# Altium PCB DebugBoard.PcbDoc
Units mm, origin at the board's own origin, x right, y up, seen from the top; angles counter-clockwise.
Board outline 45.09 x 43.18 mm, 4 copper layers (F.Cu, In1.Cu, In2.Cu, B.Cu); 20 components, 19 nets, 63 pads, 6 vias.
Unrouted connection lines stored in the file: 4.
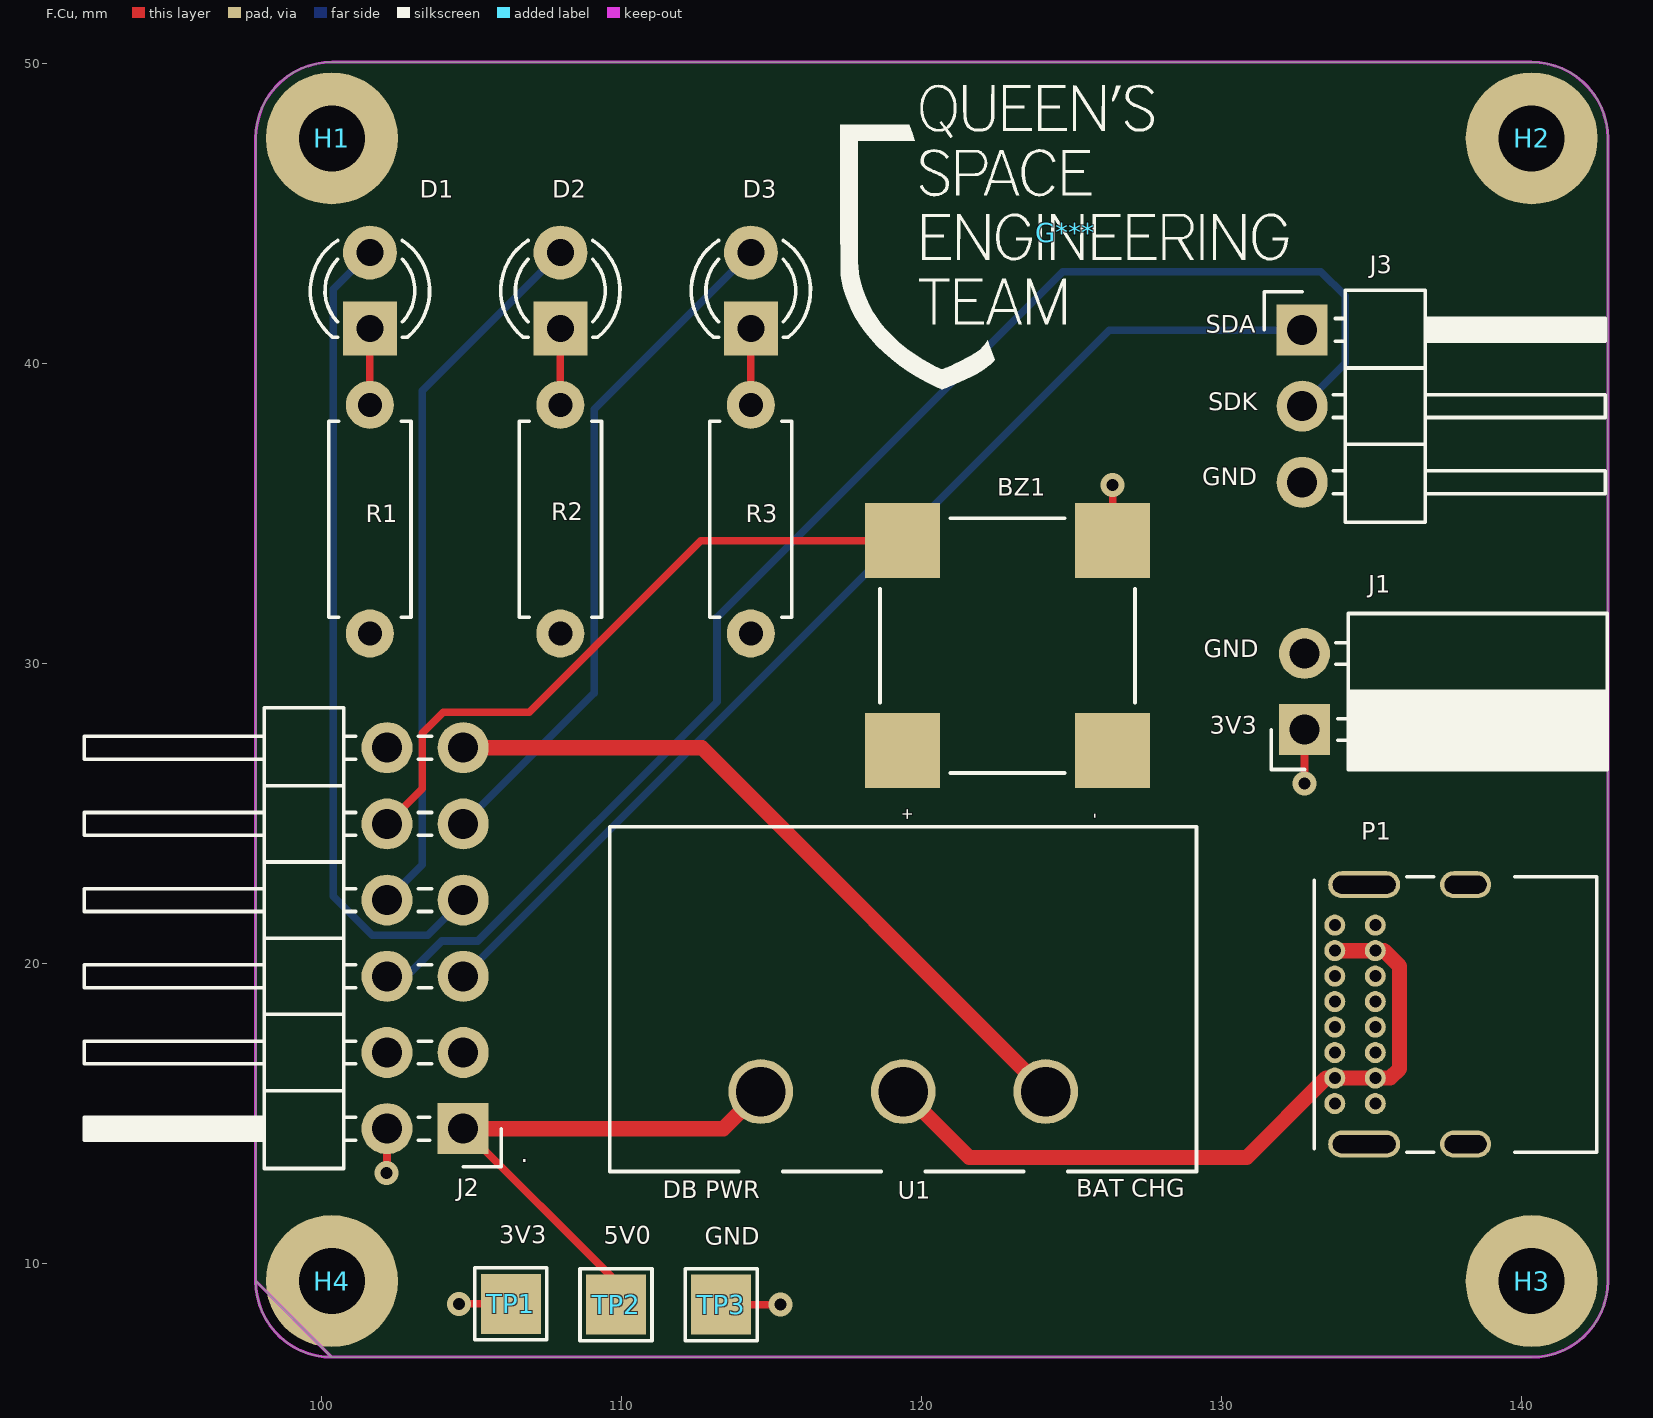
[diagram p0: F.Cu view]
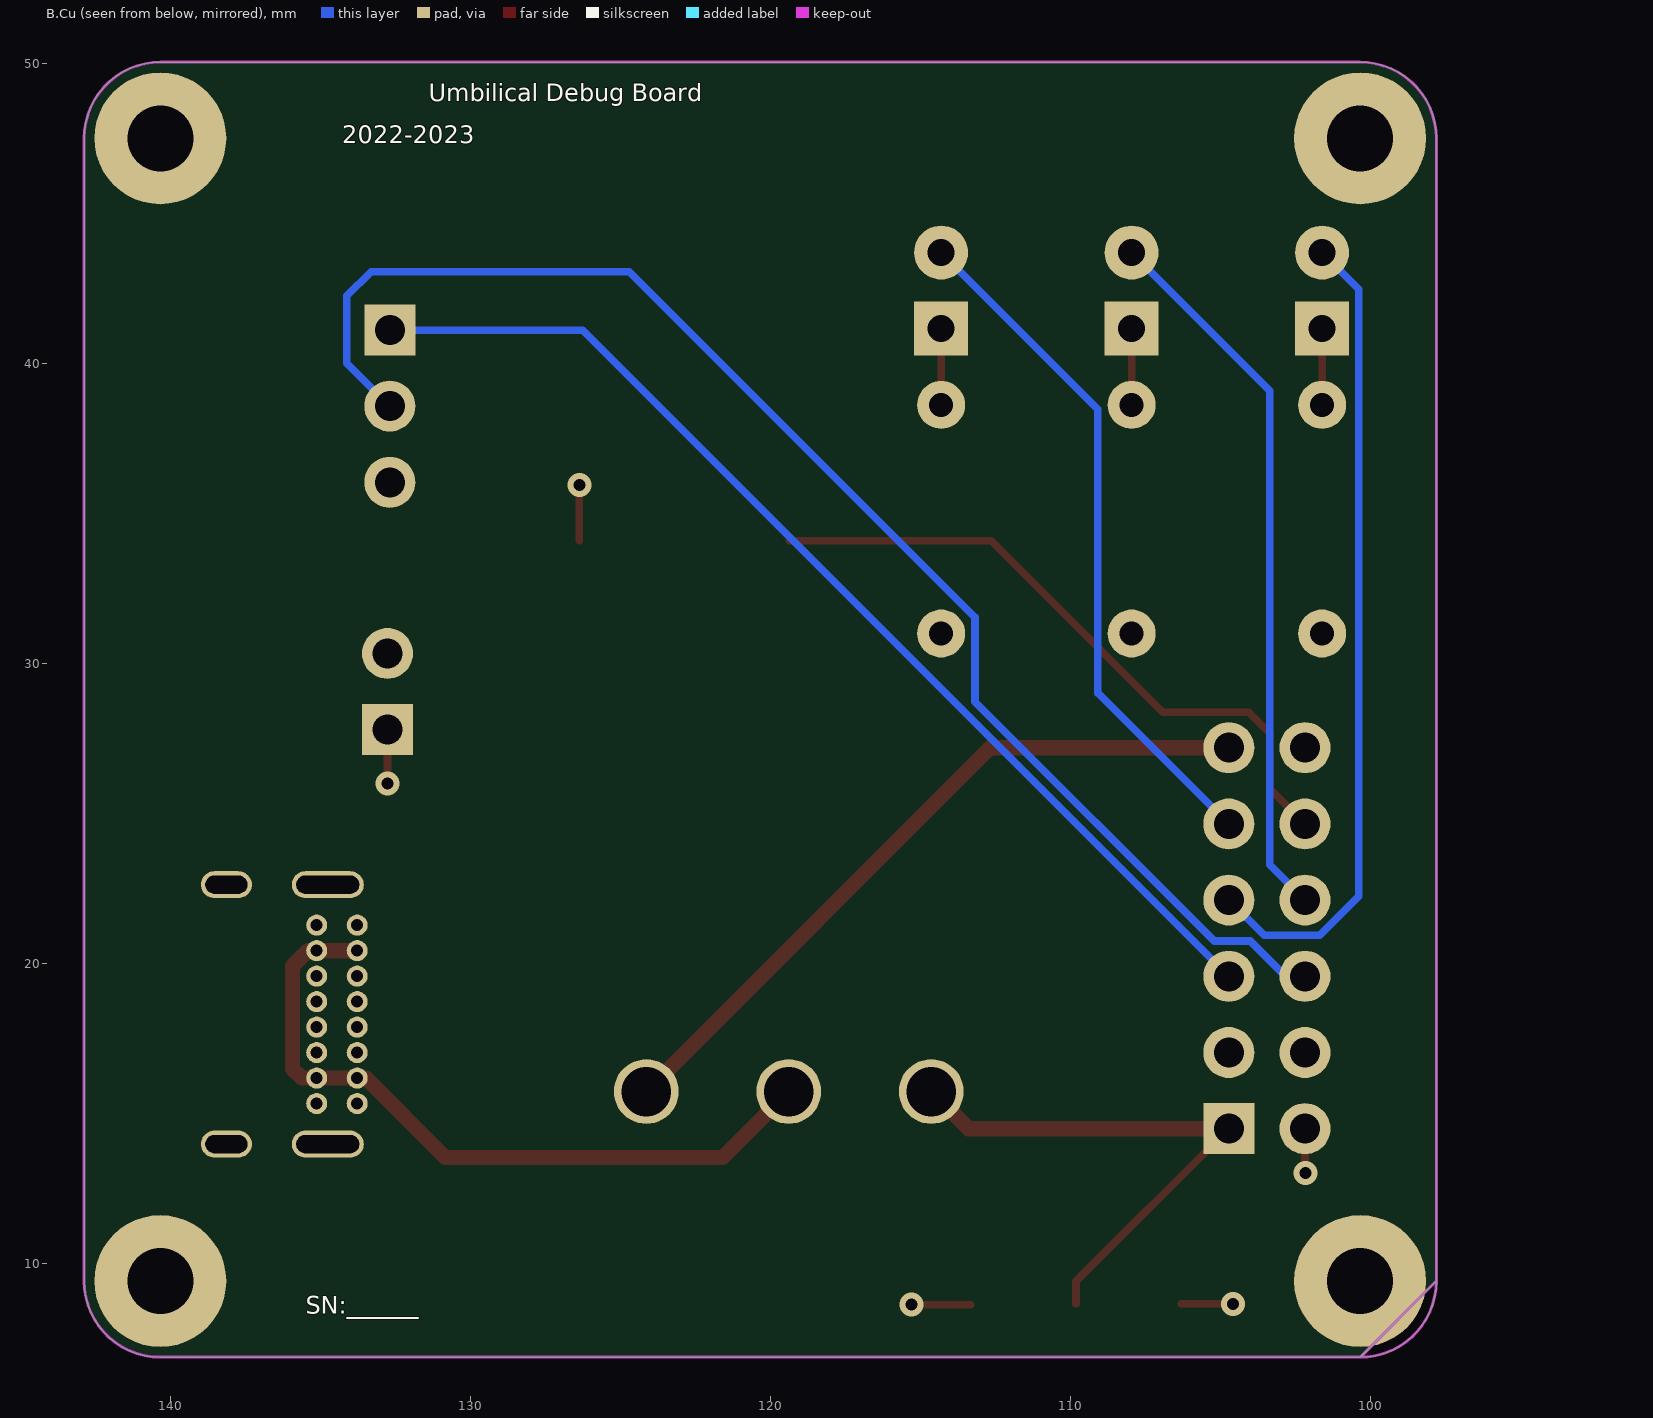
[diagram p1: B.Cu view, seen from below]
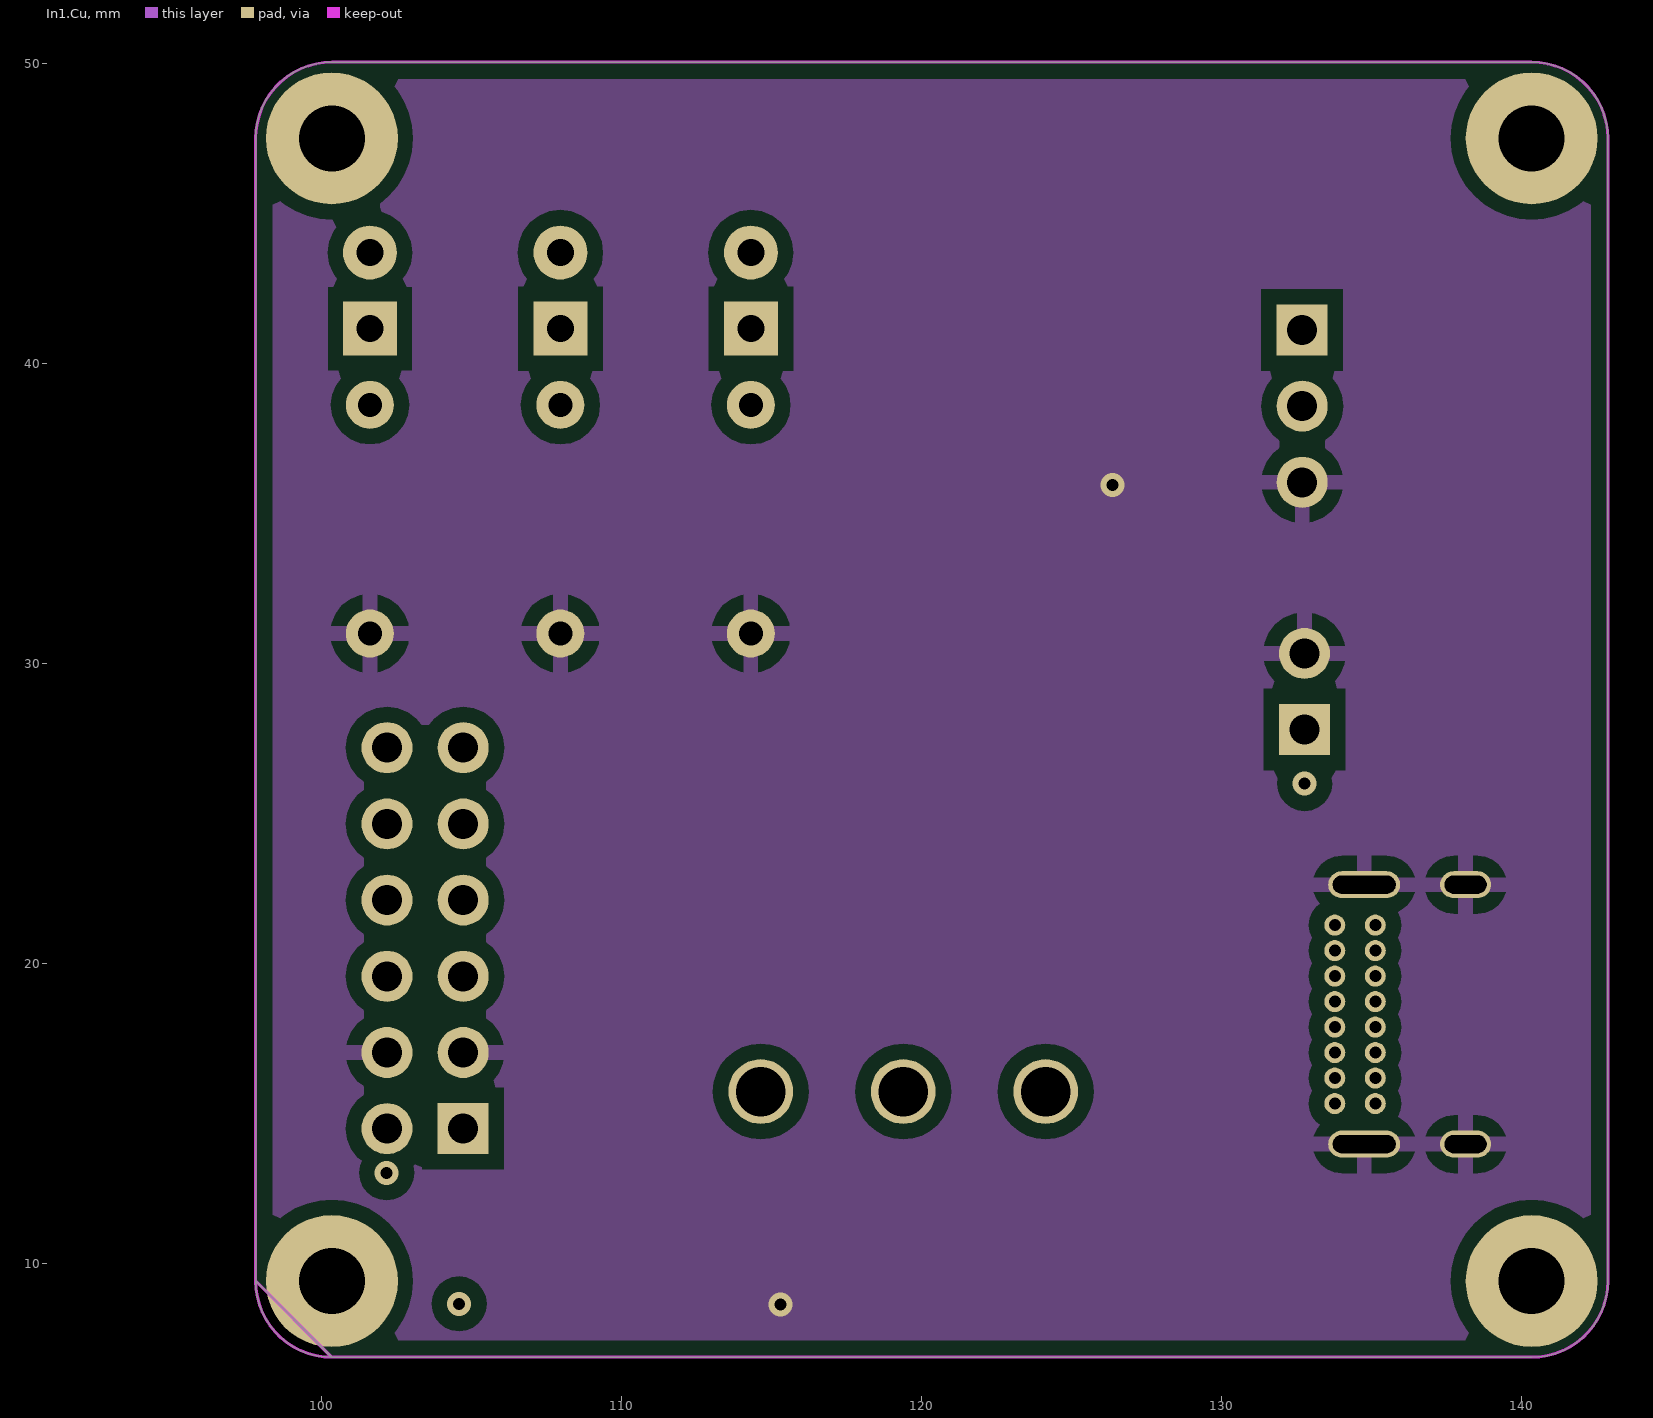
[diagram p2: In1.Cu]
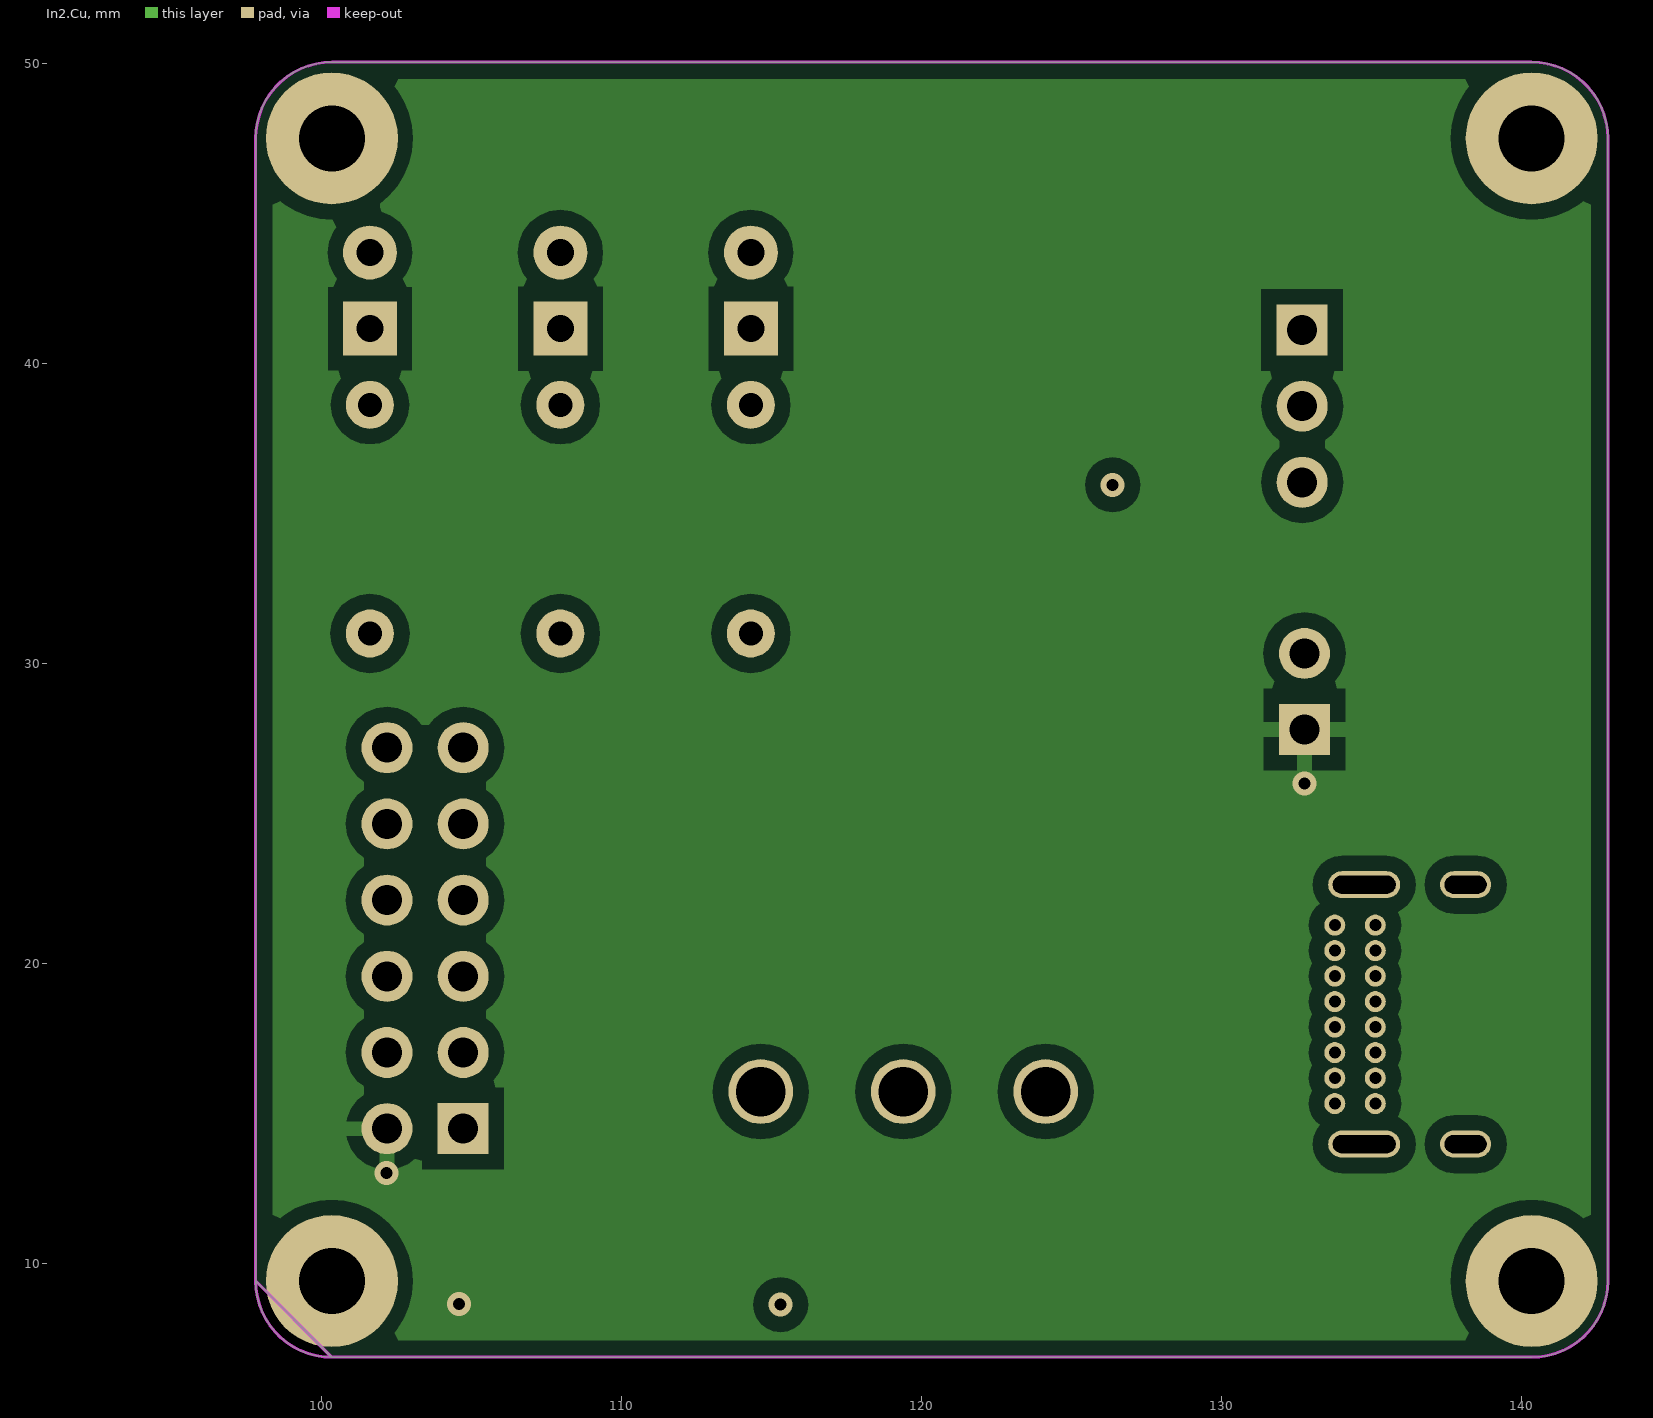
[diagram p3: In2.Cu]

## Layer stack, top to bottom
F.Mask: solder mask 0.0102, Solder Resist, Dk 3.5
F.Cu: signal copper 0.0356
Dielectric 1: dielectric 0.32, FR-4, Dk 4.8
In1.Cu: signal copper 0.0356
Dielectric2: dielectric 0.32, FR-4, Dk 4.8
In2.Cu: signal copper 0.0356
Dielectric3: dielectric 0.32, FR-4, Dk 4.8
B.Cu: signal copper 0.0356
B.Mask: solder mask 0.0102, Solder Resist, Dk 3.5

## Board outline
100.33,6.88 cw(c100.33,9.42) 97.79,9.42 97.79,47.52 cw(c100.33,47.52) 100.33,50.06 140.335,50.06 cw(c140.335,47.52) 142.875,47.52 142.875,9.42 cw(c140.335,9.42) 140.335,6.88 100.33,6.88 cw(c100.33,9.42) 100.33,6.88

## Design rules (kind name [scope] priority, off if disabled: settings)
Clearance "Clearence 0.508_Polygon" [InNamedPolygon('In1.Cu-GND') OR InNamedPolygon('In2.Cu-3V3_OUT')] p1: gap=0.508 ignorepadtopadclearanceinfootprint=FALSE
MinimumSolderMaskSliver [All] p1: minsoldermaskwidth=0
PolygonConnect Polygon_In2.Cu-3V3_OUT_ConnectDirect [IsNamedPolygon('In2.Cu-3V3_OUT') vs IsVia] p1: connectstyle=Direct reliefconductorwidth=0.254 reliefentries=4 polygonreliefangle="90 Angle" airgapwidth=0.254
PolygonConnect Polygon_In2.Cu-3V3_OUT_ConnectRelief45 [IsNamedPolygon('In2.Cu-3V3_OUT') vs (IsThruPin or IsSMTPin) and (PadShape_AllLayers = 'Round')] p2: connectstyle=Relief reliefconductorwidth=0.508 reliefentries=4 polygonreliefangle="45 Angle" airgapwidth=0.508
PolygonConnect Polygon_In2.Cu-3V3_OUT_ConnectRelief90 [IsNamedPolygon('In2.Cu-3V3_OUT') vs (IsThruPin or IsSMTPin) and (PadShape_AllLayers <> 'Round')] p3: connectstyle=Relief reliefconductorwidth=0.508 reliefentries=4 polygonreliefangle="90 Angle" airgapwidth=0.508
PolygonConnect Polygon_In1.Cu-GND_ConnectDirect [IsNamedPolygon('In1.Cu-GND') vs IsVia] p4: connectstyle=Direct reliefconductorwidth=0.254 reliefentries=4 polygonreliefangle="90 Angle" airgapwidth=0.254
PolygonConnect Polygon_In1.Cu-GND_ConnectRelief45 [IsNamedPolygon('In1.Cu-GND') vs (IsThruPin or IsSMTPin) and (PadShape_AllLayers = 'Round')] p5: connectstyle=Relief reliefconductorwidth=0.508 reliefentries=4 polygonreliefangle="45 Angle" airgapwidth=0.508
PolygonConnect Polygon_In1.Cu-GND_ConnectRelief90 [IsNamedPolygon('In1.Cu-GND') vs (IsThruPin or IsSMTPin) and (PadShape_AllLayers <> 'Round')] p6: connectstyle=Relief reliefconductorwidth=0.508 reliefentries=4 polygonreliefangle="90 Angle" airgapwidth=0.508
RoutingVias [All] p1: holewidth=0.711 width=1.27 viastyle="Through Hole" minholewidth=0.711 minwidth=1.27 maxholewidth=0.711 maxwidth=1.27
SilkToSilkClearance [All] p1: silktosilkclearance=0
SilkToSolderMaskClearance [IsPad] p1: minsilkscreentomaskgap=0 clearancetoexposedcopper=TRUE
SolderMaskExpansion [All] p1: expansion=0.102 istentingtop=FALSE
Width [All] p1: maxlimit=10 minlimit=0.254 preferedwidth=0.254 minimp=50.000000 maximp=50.000000 favimp=50.000000
27 further rules are at their usual default settings.

## Components (designator, comment, footprint, x,y, rotation, side; value= is the part's Value field where it differs from the comment)
BZ1 "Buzzer" XDCR_CMT-8504-100-SMT-TR 122.86,30.604 r90 top
D1 "RED" LED_D3.0mm 101.6,41.17 r90 top
D2 "YLW" LED_D3.0mm 107.95,41.17 r90 top
D3 "GRN" LED_D3.0mm 114.3,41.17 r90 top
G*** "LOGO" LOGO 124.79,44.37 r0 top
H1 "MountingHole" MountingHole_2.2mm_M2_Pad 100.33,47.52 r0 top
H2 "MountingHole" MountingHole_2.2mm_M2_Pad 140.335,47.52 r0 top
H3 "MountingHole" MountingHole_2.2mm_M2_Pad 140.335,9.42 r0 top
H4 "MountingHole" MountingHole_2.2mm_M2_Pad 100.33,9.42 r0 top
J1 "Conn_01x02_Female" PinSocket_1x02_P2.54mm_Horizontal 132.76,27.805 r180 top
J2 "Conn_02x06_Counter_Clockwise" PinHeader_2x06_P2.54mm_Horizontal 104.71,14.5 r180 top
J3 "Conn_01x03" PinHeader_1x03_P2.54mm_Horizontal 132.683,41.13 r0 top
P1 "USB_C_Plug_USB2.0" USB_C_Receptacle_GCT_USB4085 133.77,15.335 r90 top
R1 "R" R_Axial_DIN0207_L6.3mm_D2.5mm_P7.62mm_Horizontal 101.6,38.63 r270 top
R2 "R" R_Axial_DIN0207_L6.3mm_D2.5mm_P7.62mm_Horizontal 107.95,38.63 r270 top
R3 "R" R_Axial_DIN0207_L6.3mm_D2.5mm_P7.62mm_Horizontal 114.3,38.63 r270 top
TP1 "3V3" TestPoint_Pad_2.0x2.0mm 106.299,8.658 r0 top
TP2 "5V0" TestPoint_Pad_2.0x2.0mm 109.804,8.633 r0 top
TP3 "GND" TestPoint_Pad_2.0x2.0mm 113.309,8.633 r0 top
U1 "L102021MS02Q" L102021MS02Q 124.13,15.738 r180 top

## Footprints (in the part's own frame and the unit in brackets; to place one, negate y for a bottom-side part, rotate by r counter-clockwise, add the part's x,y. Pads: shape width x height; smd on the part's side, far side on the other; paste and mask are expansions set on the pad)
L102021MS02Q [mil]
  round 85 hole 65 paste-99999 mask+0: 1(0,0) 2(187.01,0) 3(374.02,0)
  silkscreen extent -198,-348 572,105
LED_D3.0mm [mm]
  rect 1.8x1.8 hole 0.9 paste-2539.97 mask+0: 1(0,0)
  round 1.8 hole 0.9 paste-2539.97 mask+0: 2(2.54,0)
  silkscreen extent -0.29,-1.99 2.94,1.99
LOGO [mm]
  silkscreen extent -7.5,-5.22 7.42,4.93
MountingHole_2.2mm_M2_Pad [mm]
  round 4.4 hole 2.2 paste-2539.97 mask+0: 1(0,0)
PinHeader_1x03_P2.54mm_Horizontal [mm]
  rect 1.7x1.7 hole 1 paste-2539.97 mask+0: 1(0,0)
  rrect100% 1.7x1.7 hole 1 paste-2539.97 mask+0: 2(0,-2.54) 3(0,-5.08)
  silkscreen extent -1.27,-6.41 10.1,1.33
PinHeader_2x06_P2.54mm_Horizontal [mm]
  rect 1.7x1.7 hole 1 paste-2539.97 mask+0: 1(0,0)
  rrect100% 1.7x1.7 hole 1 paste-2539.97 mask+0: 2(2.54,0) 3(0,-2.54) 4(2.54,-2.54) 5(0,-5.08) 6(2.54,-5.08) 7(0,-7.62) 8(2.54,-7.62) 9(0,-10.16) 10(2.54,-10.16) 11(0,-12.7) 12(2.54,-12.7)
  silkscreen extent -1.27,-14.03 12.64,1.33
PinSocket_1x02_P2.54mm_Horizontal [mm]
  rect 1.7x1.7 hole 1 paste-2539.97 mask+0: 1(0,0)
  rrect100% 1.7x1.7 hole 1 paste-2539.97 mask+0: 2(0,-2.54)
  silkscreen extent -10.09,-3.87 1.11,1.33
R_Axial_DIN0207_L6.3mm_D2.5mm_P7.62mm_Horizontal [mm]
  round 1.6 hole 0.8 paste-2539.97 mask+0: 1(0,0)
  rrect100% 1.6x1.6 hole 0.8 paste-2539.97 mask+0: 2(7.62,0)
  silkscreen extent 0.54,-1.37 7.08,1.37
TestPoint_Pad_2.0x2.0mm [mm]
  rect 2x2 smd paste-2 mask+0: 1(0,0)
  silkscreen extent -1.2,-1.2 1.2,1.2
USB_C_Receptacle_GCT_USB4085 [mm]
  round 0.7 hole 0.4 paste-2539.97 mask+0: A1(0,0) A4(0.85,0) A5(1.7,0) A6(2.55,0) A7(3.4,0) A8(4.25,0) A9(5.1,0) A12(5.95,0) B1(5.95,-1.35) B4(5.1,-1.35) B5(4.25,-1.35) B6(3.4,-1.35) B7(2.55,-1.35) B8(1.7,-1.35) B9(0.85,-1.35) B12(0,-1.35)
  rrect100% 0.9x2.4 hole 2.1 slot 0.6 at 0 deg paste-2539.97 mask+0: S1(-1.35,-0.98) S1(7.3,-0.98)
  rrect100% 0.9x1.7 hole 1.4 slot 0.6 at 0 deg paste-2539.97 mask+0: S1(-1.35,-4.36) S1(7.3,-4.36)
  silkscreen extent -1.62,-8.73 7.57,0.68
XDCR_CMT-8504-100-SMT-TR [mm]
  rect 2.5x2.5 smd mask+0: 1(3.5,3.5) 2(3.5,-3.5) N(-3.5,-3.5) P(-3.5,3.5)
  silkscreen extent -4.25,-4.25 4.25,4.25

## Part data
BZ1: library part XDCR_CMT-8504-100-SMT-TR, Sheetfile=DebugBoard.kicad_sch
D1 D2 D3: library part LED_D3.0mm, "LED, diameter 3.0mm, 2 pins", Sheetfile=DebugBoard.kicad_sch
H1 H2 H3 H4: library part MountingHole_2.2mm_M2_Pad, "Mounting Hole 2.2mm, M2", Sheetfile=DebugBoard.kicad_sch
J1: library part PinSocket_1x02_P2.54mm_Horizontal, "Through hole angled socket strip, 1x02, 2.54mm pitch, 8.51mm socket length, single row (from Kicad 4.0.7), script generated", Sheetfile=DebugBoard.kicad_sch
J2: library part PinHeader_2x06_P2.54mm_Horizontal, "Through hole angled pin header, 2x06, 2.54mm pitch, 6mm pin length, double rows", Sheetfile=DebugBoard.kicad_sch
J3: library part PinHeader_1x03_P2.54mm_Horizontal, "Through hole angled pin header, 1x03, 2.54mm pitch, 6mm pin length, single row", Sheetfile=DebugBoard.kicad_sch
P1: library part USB_C_Receptacle_GCT_USB4085, "USB 2.0 Type C Receptacle, https://gct.co/Files/Drawings/USB4085.pdf", Sheetfile=DebugBoard.kicad_sch
R1 R2 R3: library part R_Axial_DIN0207_L6.3mm_D2.5mm_P7.62mm_Horizontal, "Resistor, Axial_DIN0207 series, Axial, Horizontal, pin pitch=7.62mm, 0.25W = 1/4W, length*diameter=6.3*2.5mm^2, http://cdn-reichelt.de/documents/datenblatt/B400/1_4W%23YAG.pdf", Sheetfile=DebugBoard.kicad_sch
TP1 TP2 TP3: library part TestPoint_Pad_2.0x2.0mm, "SMD rectangular pad as test Point, square 2.0mm side length", Sheetfile=DebugBoard.kicad_sch
U1: Sheetfile=DebugBoard.kicad_sch

## Via types
v1: diameter 0.8, hole 0.4, F.Cu to B.Cu, tented both sides, 6 vias

## Nets (pads, with @x,y where several pads share a name; then routed paths per layer and width w, separated by ;. In a path a pad name is that pad's centre, name@x,y a point inside that pad or via, vN(x,y) a via of type N, cw(c..) or ccw(c..) an arc to the next point about the centre after c; other vN are vias at no path point)
3V3_OUT: J1.1 J2.2 TP1.1 | length 5
  F.Cu w0.254: v1(102.159,13.027) 102.17,13.038 J2.2 ; v1(104.572,8.658) TP1.1 ; J1.1 132.76,26.012 v1(132.766,26.006)
5V0-CHG: J2.11 U1.1 | length 24.2
  F.Cu w0.508: J2.11 112.668,27.2 U1.1
5V0_IN: J2.1 TP2.1 U1.3 | length 18.4
  F.Cu w0.254: J2.1 109.804,9.406 TP2.1@109.804,8.658
  F.Cu w0.508: J2.1 113.392,14.5 v1(114.63,15.738)
5VUSB: P1.A4 P1.A9 P1.B4 P1.B9 U1.2 | length 24.5
  F.Cu w0.508: U1.2 121.583,13.535 130.833,13.535 133.483,16.185 P1.A4 P1.B9 135.615,16.185 135.924,16.494 135.924,19.918 135.407,20.435 P1.B4 P1.A9
Buzzer{slash}GPIO_1: BZ1.1 J2.10 | length 22.2
  F.Cu w0.254: J2.10 103.347,25.837 103.347,27.677 104.047,28.377 106.911,28.377 112.637,34.104 BZ1.1
GND: BZ1.2 J1.2 J2.3 J2.4 J3.3 P1.A1 P1.A12 P1.B1 P1.B12 P1.S1 R1.2 R2.2 R3.2 TP3.1 | length 3.8
  F.Cu w0.254: TP3.1 v1(115.291,8.633) ; BZ1.2 126.36,35.958 v1(126.365,35.963)
GND-CHG: J2.12
I2C_SDA: J2.5 J3.1 | length 36.9
  B.Cu w0.254: J2.5 126.249,41.119 J3.1@132.673,41.119
I2C_SDK: J2.6 J3.2 | length 47.9
  B.Cu w0.254: J2.6 102.819,19.58 103.996,20.757 105.198,20.757 113.173,28.732 113.173,31.553 124.695,43.075 133.299,43.075 134.112,42.262 134.112,40.018 J3.2
LED_1: D1.2 J2.7 | length 27.3
  B.Cu w0.254: D1.2 100.373,42.483 100.373,22.252 101.682,20.943 103.533,20.943 J2.7
LED_2: D2.2 J2.8 | length 24
  B.Cu w0.254: J2.8 103.347,23.297 103.347,39.107 D2.2
LED_3: D3.2 J2.9 | length 23
  B.Cu w0.254: J2.9 109.077,29.027 109.077,38.487 D3.2
Net-(D1-Pad1): D1.1 R1.1 | length 2.5
  F.Cu w0.254: R1.1 D1.1
Net-(D2-Pad1): D2.1 R2.1 | length 2.5
  F.Cu w0.254: R2.1 D2.1
Net-(D3-Pad1): D3.1 R3.1 | length 2.5
  F.Cu w0.254: R3.1 D3.1
unconnected-(P1-PadA5): P1.A5
unconnected-(P1-PadA6): P1.A6
unconnected-(P1-PadA7): P1.A7
unconnected-(P1-PadB5): P1.B5
pads on no net: BZ1.N BZ1.P H1.1 H2.1 H3.1 H4.1 P1.A8 P1.B6 P1.B7 P1.B8

## Polygon pours and split planes (outlines as drawn)
GND on In1.Cu "In1.Cu-GND" (solid, remove dead copper, pour order 0): 142.875,6.88 97.79,6.88 97.79,50.06 142.875,50.06
3V3_OUT on In2.Cu "In2.Cu-3V3_OUT" (solid, remove dead copper, pour order 1): 142.875,6.88 97.79,6.88 97.79,50.06 142.9,50.06

## Keep-outs
Edge.Cuts:
  lines w0.1: 97.79,9.42 ccw(c100.33,9.42) 100.33,6.88 ; 97.79,9.42 ccw(c100.33,9.42) 100.33,6.88 ; 97.79,9.42 ccw(c100.33,9.42) 100.33,6.88 ; 97.79,9.42 ccw(c100.33,9.42) 100.33,6.88 ; 97.79,9.42 97.79,47.52 ; 97.79,9.42 100.33,6.88 ; 97.79,9.42 97.79,47.52 ; 97.79,47.52 cw(c100.33,47.52) 100.33,50.06 ; 97.79,47.52 cw(c100.33,47.52) 100.33,50.06 ; 100.33,6.88 140.335,6.88 ; 100.33,6.88 140.335,6.88 ; 100.33,50.06 140.335,50.06 ; 100.33,50.06 140.335,50.06 ; 140.335,6.88 ccw(c140.335,9.42) 142.875,9.42 ; 140.335,6.88 ccw(c140.335,9.42) 142.875,9.42 ; 140.335,50.06 cw(c140.335,47.52) 142.875,47.52 ; 140.335,50.06 cw(c140.335,47.52) 142.875,47.52 ; 142.875,9.42 142.875,47.52 ; 142.875,9.42 142.875,47.52

## Silkscreen, mask and mechanical layers (free items; w line width, h text height)
F.SilkS:
  text "SDA" at 129.474,40.835 h1
  text "SDK" at 129.546,38.244 h1
  text "GND" at 129.357,35.755 h1
  text "GND" at 129.407,30.014 h1
  text "3V3" at 129.608,27.474 h1
  text "." at 106.635,13.184 h1
  text "BAT CHG" at 125.146,12.031 h1
  text "DB PWR" at 111.367,11.984 h1
B.SilkS:
  text "Umbilical Debug Board" at 131.388,48.56 h1
  text "2022-2023" at 134.263,47.159 h1
  text "SN:______" at 135.482,8.123 h1

## Text inside footprints (layer, text, board x,y; h text height)
BZ1: F.Fab "-" at 126.057,24.841 h0.64 r90; F.Fab "+" at 119.81,24.763 h0.64 r90; F.SilkS "+" at 119.81,24.763 h0.64 r90; F.SilkS "-" at 126.057,24.841 h0.64 r90
P1: Dwgs.User "PCB Edge" at 140.061,17.752 h0.5 r90
U1: Cmts.User "Copyright 2021 Accelerated Designs. All rights reserved." at 123.269,15.689 h0.13